# Altium PCB photodec.PcbDoc
Units mil, origin at the board's own origin, x right, y up, seen from the top; angles counter-clockwise.
Board outline 9634.05 x 6502.12 mil, 2 copper layers (Top Layer, Top, Bottom Layer, Bottom); 16 components, 11 nets, 47 pads, 1 vias.
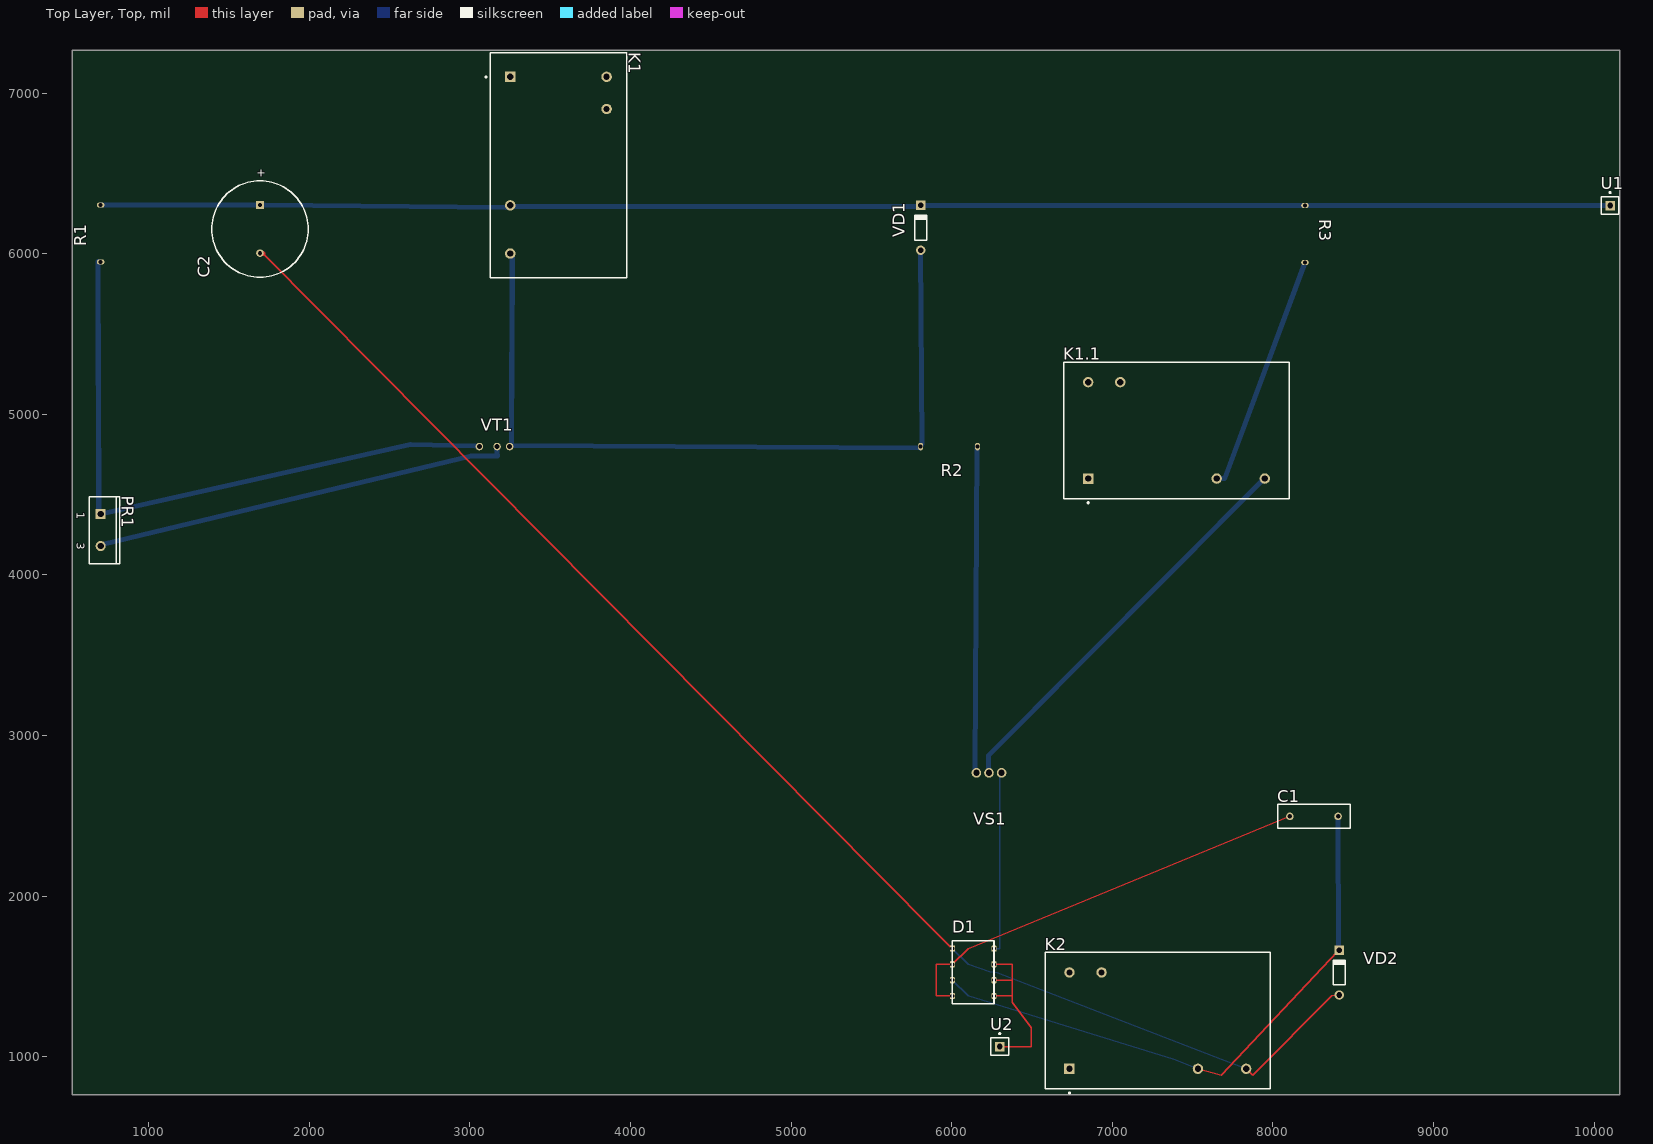
[diagram p0: Top Layer, Top view]
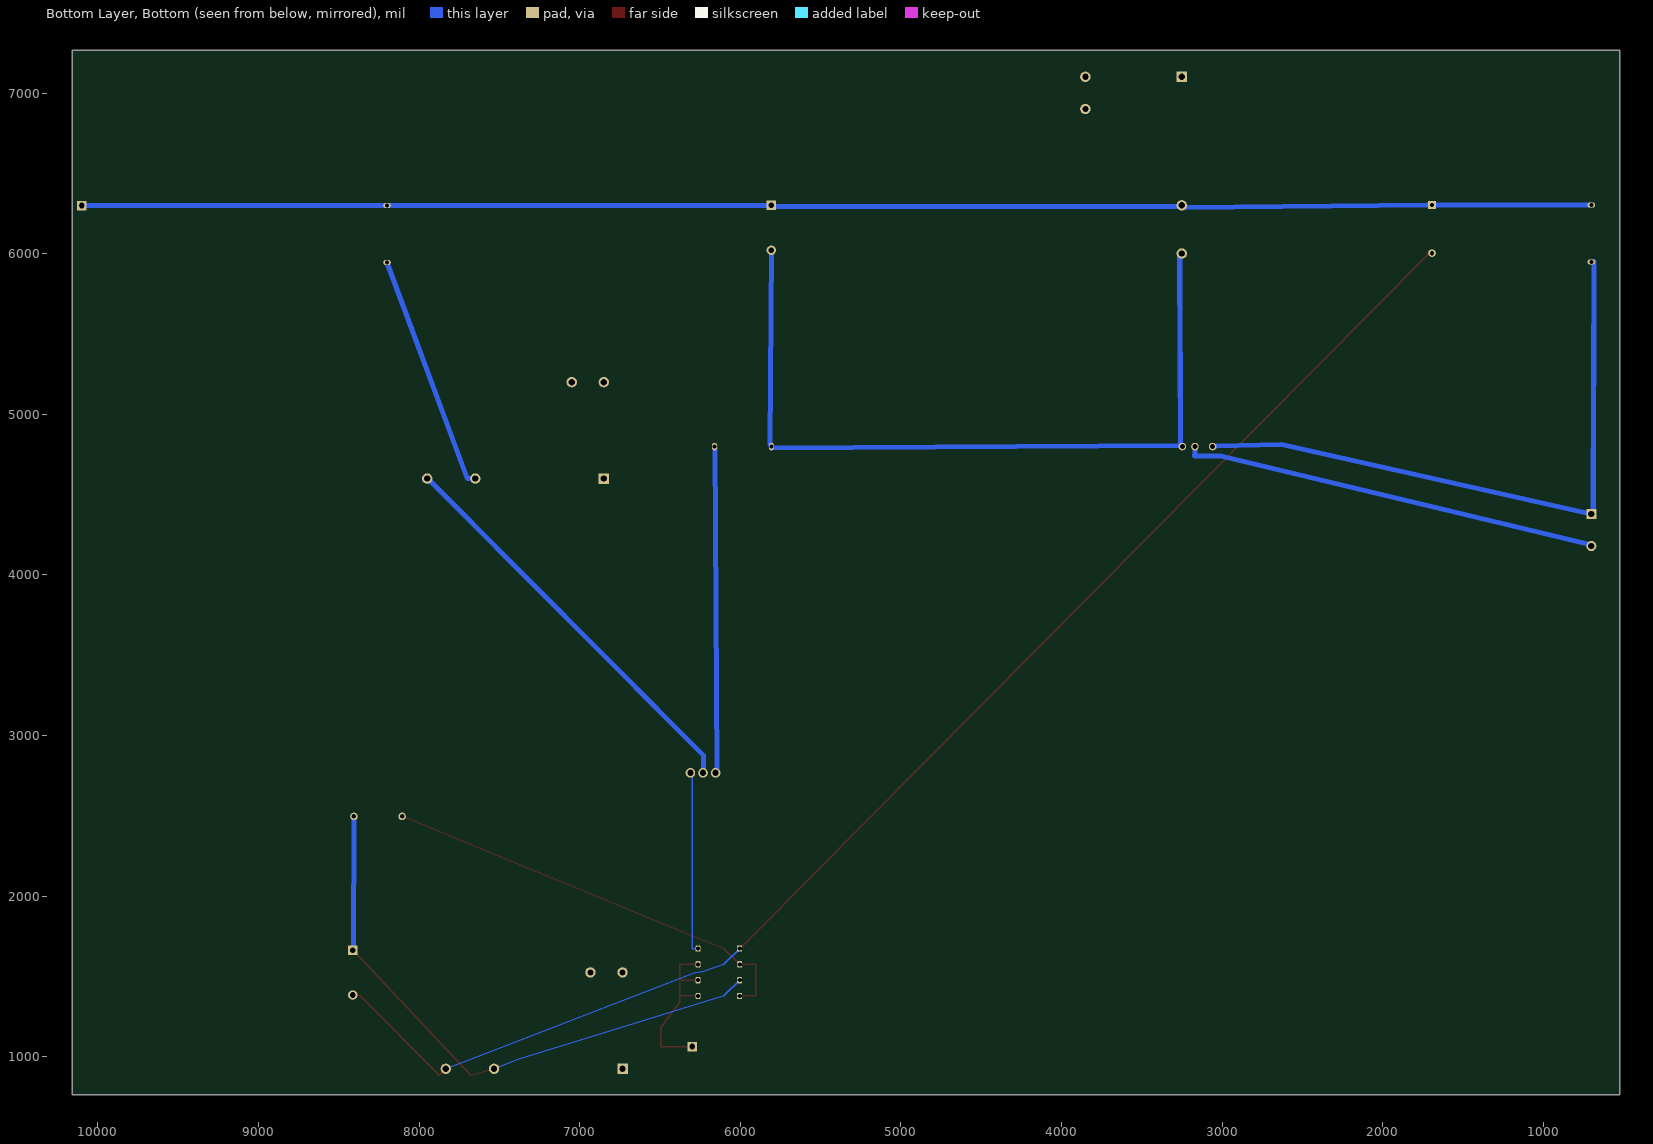
[diagram p1: Bottom Layer, Bottom view, seen from below]

## Layer stack, top to bottom
Top Solder, Top Mask: solder mask 0.4, Solder Resist, Dk 3.5
Top Layer, Top: signal copper 1.4
Dielectric 1: dielectric 12.6, FR-4, Dk 4.8
Bottom Layer, Bottom: signal copper 1.4
Bottom Solder, Bot Mask: solder mask 0.4, Solder Resist, Dk 3.5

## Board outline
525,763.78 10159.06,763.78 10159.06,7265.91 525,7265.91

## Design rules (kind name [scope] priority, off if disabled: settings)
Clearance "Clearance_Top Layer, Top" [ExistsOnLayer('Top Layer, Top') vs ExistsOnLayer('Top Layer, Top')] p1: gap=12 ignorepadtopadclearanceinfootprint=FALSE except(12.01: THPad-THPad)
Clearance "Clearance_Bottom Layer, Bottom" [ExistsOnLayer('Bottom Layer, Bottom') vs ExistsOnLayer('Bottom Layer, Bottom')] p2: gap=0 ignorepadtopadclearanceinfootprint=FALSE except(12: Arc-THPad Track-THPad)
Clearance [All] p3: gap=10 ignorepadtopadclearanceinfootprint=FALSE except(0: Arc-THPad Arc-Hole Track-THPad Track-Hole SMDPad-Hole THPad-Hole Via-Hole Fill-Hole Poly-Hole Region-Hole Text-Hole; 12: Arc-Arc Arc-Track Arc-Via Track-Track Track-Via THPad-THPad THPad-Via Via-Via)
PlaneClearance [All] p1: clearance=10
PolygonConnect [All] p1: connectstyle=Relief reliefconductorwidth=10 reliefentries=4 polygonreliefangle="90 Angle" airgapwidth=10
RoutingVias [All] p1: holewidth=28 width=50 viastyle="Through Hole" minholewidth=28 minwidth=50 maxholewidth=28 maxwidth=50
SolderMaskExpansion [All] p1: expansion=4 istentingtop=FALSE
Width [All] p1: maxlimit=10 minlimit=10 preferedwidth=10
29 further rules are at their usual default settings.

## Components (designator, comment, footprint, x,y, rotation, side; value= is the part's Value field where it differs from the comment)
C1 "0.47мк" RAD-0.3 8255.91,2496.06 r0 top
C2 "100мк" RB7.6-15 1692.91,6153.54 r90 top
D1 "" KP1006ВИ1 6003.94,1673.23 r0 top
K1 "" DIP-P5/X1.65 3551.18,6551.18 r270 top
K1.1 "" DIP-P5/X1.65 7400,4900 r0 top
K2 "" DIP-P5/X1.65 7283.46,1224.41 r0 top
PR1 "" SFM-T2(3)/X1.6V_PHOTO_NPN(Primary) 700.79,4279.53 r270 top
R1 "100k" RES_RES(Primary) 700.79,5948.82 r90 top
R2 "1k" RES_RES(Primary) 6161.42,4799.21 r180 top
R3 "10" RES_RES(Primary) 8200,6300 r270 top
U1 "" PIN1 10100,6300 r0 top
U2 "" PIN1 6299.21,1062.99 r0 top
VD1 "" DIO7.1-3.9x1.9 5807.09,6161.42 r90 top
VD2 "" DIO7.1-3.9x1.9 8413.39,1523.62 r90 top
VS1 "" КУ101А_КУ101А(Primary) 6232.28,2767.72 r180 top
VT1 "" КТ315_КТ315(Primary) 3169.29,4799.21 r270 top

## Footprints (in the part's own frame and the unit in brackets; to place one, negate y for a bottom-side part, rotate by r counter-clockwise, add the part's x,y. Pads: shape width x height; smd on the part's side, far side on the other; paste and mask are expansions set on the pad)
DIO7.1-3.9x1.9 [mm]
  round 1.5 hole 0.9: 1(-3.55,0)
  rect 1.5x1.5 hole 0.9: 2(3.55,0)
  silkscreen extent -1.95,-0.95 2.05,0.95
DIP-P5/X1.65 [mm]
  rect 1.65x1.65 hole 1: 1(-13.97,-7.62)
  round 1.65 hole 1: 2(-13.97,7.62) 3(-8.89,7.62) 4(13.97,-7.62) 5(6.35,-7.62)
  silkscreen extent -17.8,-11.57 17.8,10.8
KP1006ВИ1 [mm]
  rect 0.8x1 hole 0.65: 1(0,0)
  rrect50% 0.8x1 hole 0.65: 2(0,-2.5) 3(0,-5) 4(0,-7.5) 5(6.6,-7.5) 6(6.6,-5) 7(6.6,-2.5) 8(6.6,0)
  silkscreen extent 0,-8.75 6.6,1.25
PIN1 [mm]
  rect 1.5x1.5 hole 0.9: 1(0,0)
  silkscreen extent -1.4,-1.4 1.4,2.17
RAD-0.3 [mm]
  round 1.2 hole 0.7: 1(-3.81,0) 2(3.81,0)
  silkscreen extent -5.72,-1.91 5.71,1.91
RB7.6-15 [mm]
  rect 1.2x1.2 hole 0.7: 1(3.81,0)
  round 1.2 hole 0.7: 2(-3.81,0)
  silkscreen extent -7.62,-7.62 7.62,7.62
RES_RES(Primary) [mm]
  oval 0.8x1.2 hole 0.65: 0(0,0) 1(9,0)
SFM-T2(3)/X1.6V_PHOTO_NPN(Primary) [mm]
  rect 1.6x1.6 hole 1: 1(-2.54,0)
  round 1.6 hole 1: 3(2.54,0)
  silkscreen extent -5.3,-1.8 5.3,3
КТ315_КТ315(Primary) [mm]
  round 1.2 hole 0.8: B(0,-2.8) E(0,0) K(0,2)
КУ101А_КУ101А(Primary) [mil]
  round 60 hole 38: 0(0,0) 1(-78.74,0) 2(78.74,0)

## Via types
v1: diameter 40, hole 18, Top Layer, Top to Bottom Layer, Bottom, 1 vias

## Nets (pads, with @x,y where several pads share a name; then routed paths per layer and width w, separated by ;. In a path a pad name is that pad's centre, name@x,y a point inside that pad or via, vN(x,y) a via of type N, cw(c..) or ccw(c..) an arc to the next point about the centre after c; other vN are vias at no path point)
GND: C2.2 D1.1 K2.4 VD2.1 | length 8903.9
  Top Layer, Top w7.87: C2.2@1712.6,6000 5905.51,1771.65 D1.1 ; K2.4 7874.02,885.83 8366.14,1377.95 VD2.1
  Top Layer, Top w31.5: C2.2 C2.2@1712.6,6000
  Bottom Layer, Bottom w7.87: D1.1 6102.36,1574.8 6236.22,1527.56 6283.46,1523.62 7677.17,984.25 K2.4
NET00000: C2.1 K1.5 R1.1 R3.0 U1.1 VD1.2 | length 9418.2
  Bottom Layer, Bottom w31.5: R1.1 1673.23,6303.15 C2.1 1720.47,6303.15 3224.41,6287.4 K1.5 3275.59,6295.28 5775.59,6295.28 VD1.2@5800.79,6300 ; U1.1 R3.0 VD1.2@5800.79,6300 ; VD1.2@5800.79,6300 VD1.2 5800,6300 VD1.2@5800.79,6300
NET00001: K1.4 R2.1 VD1.1 VT1.K | length 5007.1
  Bottom Layer, Bottom w31.5: K1.4 3263.78,5972.44 3259.84,4807.09 VT1.K@3259.73,4807.01 ; VD1.1 5814.96,4814.96 R2.1 5803.15,4791.34 VT1.K@3259.73,4807.01 ; VT1.K@3259.73,4807.01 3248.03,4807.09 VT1.K VT1.K@3259.73,4807.01
NET00002: PR1.1 R1.0 VT1.B | length 3999
  Bottom Layer, Bottom w31.5: R1.0 685.04,5952.76 688.98,4401.57 PR1.1 716.54,4381.89 2629.92,4811.02 3035.43,4803.15 3051.18,4799.21 VT1.B
NET00003: PR1.3 VT1.E | length 2607.5
  Bottom Layer, Bottom w31.5: PR1.3 724.41,4188.98 724.41,4192.91 3007.87,4740.16 3173.23,4740.16 3165.35,4787.4 3173.23,4795.28 VT1.E
NET00006: K1.1.4 VS1.0 | length 2557.9
  Bottom Layer, Bottom w31.5: VS1.0 6228.35,2783.46 6228.35,2874.02 7952.76,4606.3 K1.1.4
NET00007: C1.1 D1.2 D1.4 | length 2698.8
  Top Layer, Top w7.87: D1.4 5905.51,1377.95 5905.51,1574.8 D1.2 6102.36,1673.23 C1.1
NET00008: D1.8 VS1.1 | length 1147.3
  Bottom Layer, Bottom w7.87: D1.8 6299.21,1673.23 6299.21,2755.91 VS1.1
  Bottom Layer, Bottom w31.5: VS1.1@6307.09,2755.91 VS1.1
NET00009: K1.1.5 R3.1 | length 1485.6
  Bottom Layer, Bottom w31.5: K1.1.5 7700,4600 R3.1
NET00010: R2.0 VS1.2 | length 2042.6
  Bottom Layer, Bottom w31.5: VS1.2 6145.67,2787.4 6157.48,4803.15 R2.0
NET00011: C1.2 D1.3 K2.5 VD2.2 | length 3694.1
  Top Layer, Top w7.87: K2.5 7677.17,885.83 v1(8405.51,1657.48)
  Bottom Layer, Bottom w7.87: D1.3 6102.36,1377.95 7381.89,984.25 K2.5
  Bottom Layer, Bottom w31.5: v1(8405.51,1657.48) VD2.2 8409.45,1673.23 8405.51,2480.32 C1.2
pads on no net: D1.5 D1.6 D1.7 K1.1 K1.1.1 K1.1.2 K1.1.3 K1.2 K1.3 K2.1 K2.2 K2.3 U2.1
copper on no net: | length 1881.9
  Top Layer, Top w7.87: 6299.21,1062.99 6496.06,1062.99 6496.06,1181.1 ; 6259.84,1377.95 6377.95,1377.95 ; 6259.84,1377.95 6263.78,1377.95 ; 6259.84,1377.95 6263.78,1377.95 ; 6259.84,1377.95 6263.78,1377.95 ; 6263.78,1377.95 6377.95,1377.95 ; 6377.95,1338.58 6496.06,1181.1 ; 6377.95,1338.58 6496.06,1181.1 ; 6377.95,1338.58 6377.95,1377.95 ; 6377.95,1338.58 6377.95,1456.69 6377.95,1574.8 ; 6377.95,1377.95 6377.95,1476.38 ; 6377.95,1476.38 6263.78,1476.38 6377.95,1476.38 ; 6377.95,1476.38 6377.95,1574.8 ; 6377.95,1574.8 6263.78,1574.8 6377.95,1574.8

## Text inside footprints (layer, text, board x,y; h text height)
C2: Top Overlay, Top Silk "+" at 1721.92,6473.7 h49.21 r90
PR1: Top Overlay, Top Silk "3" at 552.17,4199.21 h49.21 r270; Top Overlay, Top Silk "1" at 552.17,4389.37 h49.21 r270